# EAGLE board simple-ldr (EAGLE 8.5.2)
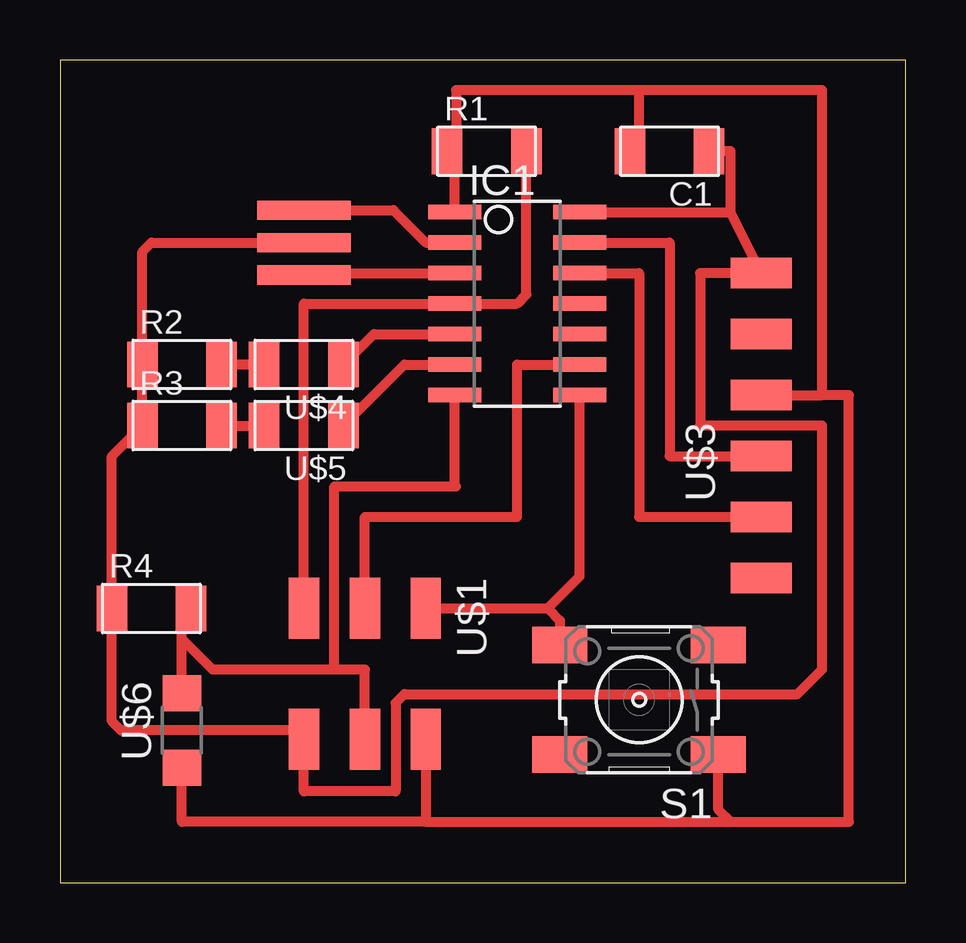
[diagram p0: board, top side]

Size 35.23 x 34.28 mm. Coordinates in mm from the lower left corner, seen from the top.
Outline: 0,0 35.23,0 35.23,34.28 0,34.28 0,0
Copper layers (1*16): Top 0.035mm / dielectric 1.5mm / Bottom 0.035mm
Design rules "fabmodule": minimum track width 10mil, minimum drill 0.4mm, track to track 0.42mm, track to pad 0.42mm, pad to pad 0.42mm, via to via 0.42mm, smd to smd 0.42mm, copper to edge 40mil, drill to drill 0.8mm, minimum pad ring 10mil, minimum via ring 8mil, stop-mask expansion 4mil, vias tented up to drill 0mil, thermal gap 10mil

## Footprints (pad centres in the part's own frame; a part is rotated, then mirrored left to right if it is on the bottom)
C1206FAB = smd 1.27 x 1.905: 1 -1.651,0; 2 1.651,0
SOIC14 = smd 0.61 x 2.21: 1 -3.81,-2.603; 2 -2.54,-2.603; 3 -1.27,-2.603; 4 0,-2.603; 5 1.27,-2.603; 6 2.54,-2.603; 7 3.81,-2.603; 8 3.81,2.603; 9 2.54,2.603; 10 1.27,2.603; 11 0,2.603; 12 -1.27,2.603; 13 -2.54,2.603; 14 -3.81,2.603
R1206FAB = smd 1.27 x 1.905: 1 -1.651,0; 2 1.651,0
6MM_SWITCH = smd 2.286 x 1.524: 1 -3.302,2.286; 2 3.302,2.286; 3 -3.302,-2.286; 4 3.302,-2.286
2X03SMD = smd 2.54 x 1.27: 1 -2.54,2.54; 2 2.92,2.54; 3 -2.54,0; 4 2.92,0; 5 -2.54,-2.54; 6 2.92,-2.54
EFOBM = smd 0.8 x 3.9: 1 -1.35,0; 2 0,0; 3 1.35,0
1X06SMD = smd 2.54 x 1.27: 1 0,6.35; 2 0,3.81; 3 0,1.27; 4 0,-1.27; 5 0,-3.81; 6 0,-6.35
LED1206FAB = smd 1.27 x 1.905: 1 -1.651,0; 2 1.651,0
OP1206 = smd 1.5 x 1.6: COLLECTOR -1.55,0; EMITTER 1.55,0

## Placement (x,y rotation side)
C1  1uF  [C1206FAB]  25.4,30.48 180 top
IC1  ATTINY44-SSU  [SOIC14]  19.05,24.13 270 top
R1  10k  [R1206FAB]  17.78,30.48 0 top
R2  500  [R1206FAB]  5.08,21.59 0 top
R3  500  [R1206FAB]  5.08,19.05 0 top
R4  10k  [R1206FAB]  3.81,11.43 0 top
S1  BUTTON  [6MM_SWITCH]  24.13,7.62 180 top
U$1  AVRISPSMD  [2X03SMD]  12.7,8.89 270 top
U$2  RESONATOR  [EFOBM]  10.16,26.67 270 top
U$3  FTDI-SMD-HEADER  [1X06SMD]  29.21,19.05 0 top
U$4  LEDFAB1206  [LED1206FAB]  10.16,21.59 180 top
U$5  LEDFAB1206  [LED1206FAB]  10.16,19.05 180 top
U$6  PHOTOTRANSISTOR-NPN1206  [OP1206]  5.08,6.35 90 top

## Library data of the parts
C1 IC1 R1-R4 S1 U$1-U$6 = fab

## Nets
CTS: U$3.2
GND: C1.1 IC1.14 R2.1 R3.1 R4.1 U$1.6 U$2.2 U$3.1
MISO: IC1.8 S1.4 U$1.1
MOSI: IC1.7 R4.2 U$1.4 U$6.EMITTER
N$1: R2.2 U$4.2
N$2: R3.2 U$5.2
PA0: IC1.13 U$3.4
PA1: IC1.12 U$3.5
PA2: IC1.11
PA3: IC1.10
PA7: IC1.6 U$5.1
PB0: IC1.2 U$2.1
PB1: IC1.3 U$2.3
PB2: IC1.5 U$4.1
RESET: IC1.4 R1.2 U$1.5
RTS: U$3.6
SCK: IC1.9 U$1.3
VCC: C1.2 IC1.1 R1.1 S1.1 U$1.2 U$3.3 U$6.COLLECTOR

## Tracks (layer width: path | path; a pad name or v marks a point on that pad's centre or on a via)
GND
  Top 0.406: 27.94,27.94 U$3.1 26.67,25.4 26.67,19.05 31.75,19.05 31.75,8.89 30.72,7.86 14.35,7.86 13.98,7.5 13.98,3.82 13.97,3.81 10.16,3.81 U$1.6 9.78,6.35 2.54,6.35 2.16,6.73 R4.1 2.16,17.78 R3.1 R2.1 3.43,26.29 3.81,26.67 U$2.2 | 27.94,27.94 27.94,30.48 C1.1 | IC1.14 27.94,27.94
MISO
  Top 0.406: U$1.1 20.32,11.43 | 20.32,11.43 20.83,10.92 S1.4 | 20.32,11.43 21.65,12.76 IC1.8
MOSI
  Top 0.406: U$1.4 12.7,8.89 11.43,8.89 | IC1.7 16.45,16.57 16.51,16.51 11.43,16.51 11.43,8.89 | U$6.EMITTER 5.08,10.16 | 5.08,10.16 5.08,11.05 R4.2 | 5.08,10.16 6.35,8.89 11.43,8.89
N$1
  Top 0.406: U$4.2 R2.2
N$2
  Top 0.406: R3.2 U$5.2
PA0
  Top 0.406: IC1.13 25.4,26.67 25.4,17.78 U$3.4
PA1
  Top 0.406: IC1.12 24.13,25.4 24.13,15.24 U$3.5
PA7
  Top 0.406: U$5.1 14.35,21.59 IC1.6
PB0
  Top 0.406: 10.24,27.94 U$2.1 13.89,28.02 15.24,26.67 IC1.2
PB1
  Top 0.406: U$2.3 10.24,25.4 IC1.3
PB2
  Top 0.406: U$4.1 13.08,22.86 IC1.5
RESET
  Top 0.406: R1.2 19.43,24.51 19.05,24.13 IC1.4 10.16,24.13 U$1.5
SCK
  Top 0.406: IC1.9 19.05,21.59 19.05,15.24 12.7,15.24 U$1.3
VCC
  Top 0.406: U$1.2 15.24,2.54 | U$3.3 31.75,20.32 | 31.75,20.32 31.75,33.02 24.13,33.02 | 24.13,33.02 16.51,33.02 16.51,30.86 16.32,30.67 | 16.32,30.67 R1.1 | IC1.1 16.45,30.54 16.32,30.67 | 15.24,2.54 27.94,2.54 | 27.94,2.54 32.87,2.54 32.87,20.32 31.75,20.32 | 15.24,2.54 5.08,2.54 U$6.COLLECTOR | C1.2 24.13,30.86 24.13,33.02 | 27.94,2.54 27.43,3.05 S1.1